# EAGLE board rw-linear-17mm-mk-1.3 (EAGLE 7.5.0)
VERSION: v1.3
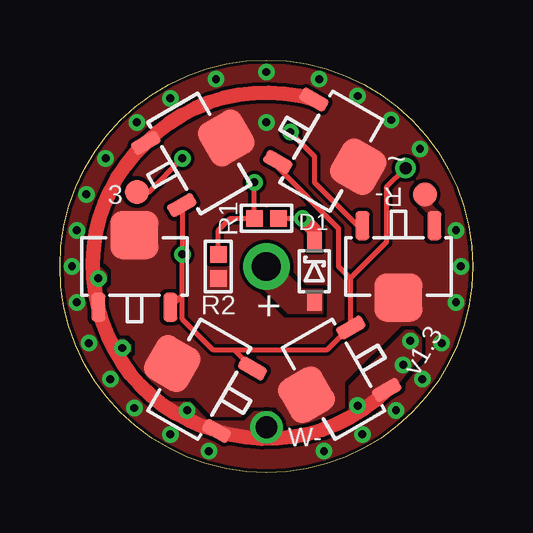
[diagram p0: board, top side]
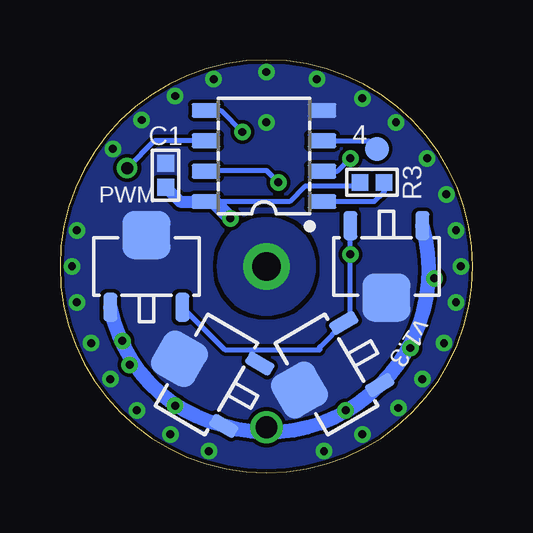
[diagram p1: board, bottom side, seen from below]

Size 17.2 x 17.2 mm. Coordinates in mm from the lower left corner, seen from the top.
Outline: 0,8.6 arc-180 17.2,8.6 arc-180 0,8.6
Copper layers (1*16): Top 0.0356mm / dielectric 1.5011mm / Bottom 0.0356mm
Design rules "LaenPCBOrder2": minimum track width 6mil, minimum drill 13mil, track to track 6mil, track to pad 6mil, pad to pad 6mil, via to via 6mil, smd to smd 6mil, copper to edge 6mil, drill to drill 6mil, minimum pad ring 7mil, minimum via ring 7mil, stop-mask expansion 3mil, vias tented up to drill 20mil, thermal gap 10mil

## Footprints (pad centres in the part's own frame; a part is rotated, then mirrored left to right if it is on the bottom)
1X01-SMD-1MM-DIA-NS = smd 1 x 1: P$1 0,0
1X01-1.2MM-NS = drill 1.2 pad 1.93: P$1 0,0
C0402 = smd 0.7 x 0.7: 1 -0.5,0; 2 0.5,0
SOD323-SCHOTTKY = smd 0.8 x 0.6: A -1.25,0; C 1.25,0
R0402 = smd 0.7 x 0.7: 1 -0.5,0; 2 0.5,0
SO08-NARROWER = smd 0.6 x 1.2: 1 -1.905,-2.416; 2 -0.635,-2.416; 3 0.635,-2.416; 4 1.905,-2.416; 5 1.905,2.416; 6 0.635,2.416; 7 -0.635,2.416; 8 -1.905,2.416
SOT89-NOTHERM-ROUNDED-LESS = smd 0.58 x 1.2: 1 -1.5,-1.7; 3 1.5,-1.7 | smd 2 x 2: 4 0,1.3
1X01-0.9MM-CIR = drill 0.9 pad 1.3: P$1 0,0

## Placement (x,y rotation side)
3  M01SMD-1MM-DIA-NS  [1X01-SMD-1MM-DIA-NS]  3.2,11.7 0 top
4  M01SMD-1MM-DIA-NS  [1X01-SMD-1MM-DIA-NS]  4,13.5 0 bottom
+  M01PTH-1.2MM-NS  [1X01-1.2MM-NS]  8.6,8.6 90 top
C1  1u  [C0402]  12.8,12.4 90 bottom
D1  BAT165  [SOD323-SCHOTTKY]  10.6,8.4 90 top
FRAME1  FRAME-LETTERNO_PACKAGE  [DUMMY]  0.1,0.1 0 top
R1  19K  [R0402]  8.6,10.6 0 top
R2  4K7  [R0402]  6.6,8.6 90 top
R3  10K  [R0402]  4.2,12.1 180 bottom
R-  M01SMD-1MM-DIA-NS  [1X01-SMD-1MM-DIA-NS]  15.2,11.6 0 top
U1  Tiny25  [SO08-NARROWER]  8.7,13.2 90 bottom
U2  AMC7135  [SOT89-NOTHERM-ROUNDED-LESS]  14.1,8.6 180 top
U3  AMC7135  [SOT89-NOTHERM-ROUNDED-LESS]  11.3,13.4 240 top
U4  AMC7135  [SOT89-NOTHERM-ROUNDED-LESS]  5.8,13.3 300 top
U5  AMC7135  [SOT89-NOTHERM-ROUNDED-LESS]  3.1,8.6 0 top
U6  AMC7135  [SOT89-NOTHERM-ROUNDED-LESS]  5.8,3.9 60 top
U7  AMC7135  [SOT89-NOTHERM-ROUNDED-LESS]  11.4,3.9 120 top
U8  AMC7135  [SOT89-NOTHERM-ROUNDED-LESS]  3.6,8.6 180 bottom
U9  AMC7135  [SOT89-NOTHERM-ROUNDED-LESS]  13.6,8.6 0 bottom
U10  AMC7135  [SOT89-NOTHERM-ROUNDED-LESS]  11.1,4.1 60 bottom
U11  AMC7135  [SOT89-NOTHERM-ROUNDED-LESS]  6.1,4.1 120 bottom
W-  M011X01-0.9MM-CIR  [1X01-0.9MM-CIR]  8.6,1.9 270 top

## Library data of the parts
3 4 + C1 D1 R1-R3 R- U1-U11 W- = a_parts
FRAME1 = a_parts; DESIGNER: sean@yak.net; VERSION: v1.2

## Nets
3: 3.P$1 U1.2
4: 4.P$1 U1.3
BATT_DIV: R1.1 R2.2 U1.7
GND: C1.2 R2.1 U1.4 U2.4 U3.4 U4.4 U5.4 U6.4 U7.4 U8.4 U9.4 U10.4 U11.4
N$1: R3.1 U1.1
PWM_R: U1.5 U2.3
PWM_W: U1.6 U3.3 U4.3 U5.3 U6.3 U7.3 U8.3 U9.3 U10.3 U11.3
RED_K: R-.P$1 U2.1
VBAT: +.P$1 D1.A
VCC: C1.1 D1.C R1.2 R3.2 U1.8
WHITE_K: U3.1 U4.1 U5.1 U6.1 U7.1 U8.1 U9.1 U10.1 U11.1 W-.P$1

## Tracks (layer width: path | path; a pad name or v marks a point on that pad's centre or on a via)
3  (via drill 0.33)
  Top 0.2: v5.1,13.1 3.7,11.7 3.P$1
  Bottom 0.2: U1.2 5.63,12.57 v5.1,13.1
4
  Bottom 0.2: U1.3 4.33,13.84 4.P$1
BATT_DIV  (via drill 0.33)
  Top 0.2: R2.2 6.6,10.1 7.1,10.6 R1.1 v8.1,12.1
  Bottom 0.2: 11.08,12.6 8.6,12.6 v8.1,12.1
  Bottom 0.25: U1.7 11.08,12.6
GND  (via drill 0.33)
  other vias: 8.6,14.6 8.6,16.7 6.5,16.4 10.8,16.4 0.5,8.6 0.7,10.1 0.7,7.1 11,0.9 12.6,1.6 14,2.6 4.6,1.6 6.2,0.9 3.1,2.7 16.7,8.6 16.5,10.1 16.5,7.1 15.1,3.9 15.9,5.4 1.2,5.4 2.1,3.9 3.2,14.6 1.1,11.6 1.9,13.1 4.6,15.6 12.4,15.7 13.8,14.7 15,13.5
  pour Top (isolate 0.152, rank 6, no thermals): 0.1,8.6 arc90 8.6,0.1 arc90 17.1,8.6 arc90 8.6,17.1 arc90
  pour Bottom (isolate 0.152, rank 6, no thermals): 17.1,8.6 arc-90 8.6,0.1 arc-90 0.1,8.6 arc-90 8.6,17.1 arc-90
N$1
  Bottom 0.2: R3.1 3.7,11.7 4.1,11.3 U1.1
  Bottom 0.25: U1.1
PWM_R  (via drill 0.33)
  Top 0.2: v9.6,14.2 10.6,13.2 10.6,12.1 12.4,10.3 U2.3
  Bottom 0.2: U1.5 10.5,15.11 v9.6,14.2
PWM_W  (via drill 0.33, 0.5)
  Top 0.2: 7.26,5.11 11.11,5.11 12.05,6.05 U7.3 12.1,6.07 12.1,8.1 | U6.3 7.26,5.11 | 7.26,5.11 6.39,5.11 5.1,6.4 5.1,7.4 | U4.3 5.1,11.13 v5.1,9.1 5.1,7.4 | U5.3 5.1,7.4 | v14.4,12.7 13.6,11.9 13.6,9.6 12.1,8.1 | U3.3 9.08,12.72 11.6,10.2 11.6,8.6 12.1,8.1
  Bottom 0.2: U8.3 v5.1,9.1 5.1,6.53 U11.3 6.39,5.24 6.39,5.11 9.2,5.11 | 9.2,5.11 10.31,5.11 U9.3 | U10.3 9.2,4.87 9.2,5.11 | U1.6 13.26,13.84 v14.4,12.7
RED_K
  pour Top (isolate 0.152, rank 2, no thermals): 15.1,11.6 15.3,11.6 15.3,11.3 15.8,10.8 15.8,10.1 15.4,10.1 15.4,10.8 15.1,11.1
VBAT
  pour Bottom (isolate 0.152, no thermals): 6.6,8.6 arc-180 10.6,8.6 arc-180
  pour Top (isolate 0.152, rank 2, no thermals): 8.1,9.1 8.1,8.1 9.5,6.7 10.9,6.7 10.9,7.6 10.1,7.6 9.1,8.6 9.1,9.1
VCC  (via drill 0.33)
  Top 0.2: R1.2 v10.1,10.6
  Top 0.6: D1.C 10.6,10.1 v10.1,10.6
  Bottom 0.2: R3.2 4.87,11.93 7,11.93 7.63,11.3 U1.8
  Bottom 0.5: C1.1 12.2,11.3 U1.8
  Bottom 0.6: v10.1,10.6 10.79,11.3 U1.8
WHITE_K  (via drill 0.33)
  Top 0.6: U7.1 arc-62 U6.1 arc-62 U5.1 arc-62 U4.1 arc-62 U3.1
  Bottom 0.6: U10.1 arc-62 U11.1 arc-62 U8.1 | W-.P$1 8.6,1.7 arc15 U10.1 | U10.1 arc65 U9.1
  other vias: 1.6,8.1 14.3,4.5 2.6,5.2 5.3,2.6 12.4,2.8 14.6,5.5
  pour Top (isolate 0.152, rank 2, no thermals): 2.1,5.4 2.1,5.1 2.4,4.9 2.7,4.9 2.9,5.1 2.9,5.3 2.7,5.5 2.3,5.5 2,6.1 1.7,7 1.7,7.8 1.9,8 1.9,8.3 1.7,8.5 1.5,8.5 1.2,8.2 1.5,7 1.7,6.1
  pour Top (isolate 0.152, rank 2, no thermals): 6.1,2.1 6.1,1.8 7.6,1.3 9.1,1.3 9.2,1.4 9.2,2 8.8,2.5 8.1,2.5 7.7,2.1
  pour Top (isolate 0.152, rank 2, no thermals): 5,2.2 4.6,2.4 4.6,2.9 5.4,2.9 6.1,2.2 6.6,1.5
  pour Top (isolate 0.152, rank 2, no thermals): 12.1,2.6 12.6,2.6 13.7,3.3 14.6,4.4 15,4.8 15,5.6 14.7,5.9 14.4,5.9 12.1,3.6

## Text on the board
tPlace: ~
bPlace: PWM